# Altium PCB 起跑.PcbDoc
Units mm, origin at the board's own origin, x right, y up, seen from the top; angles counter-clockwise.
Board outline 161 x 31 mm, 2 copper layers (Top Layer, Bottom Layer); 33 components, 13 nets, 92 pads, 27 vias.
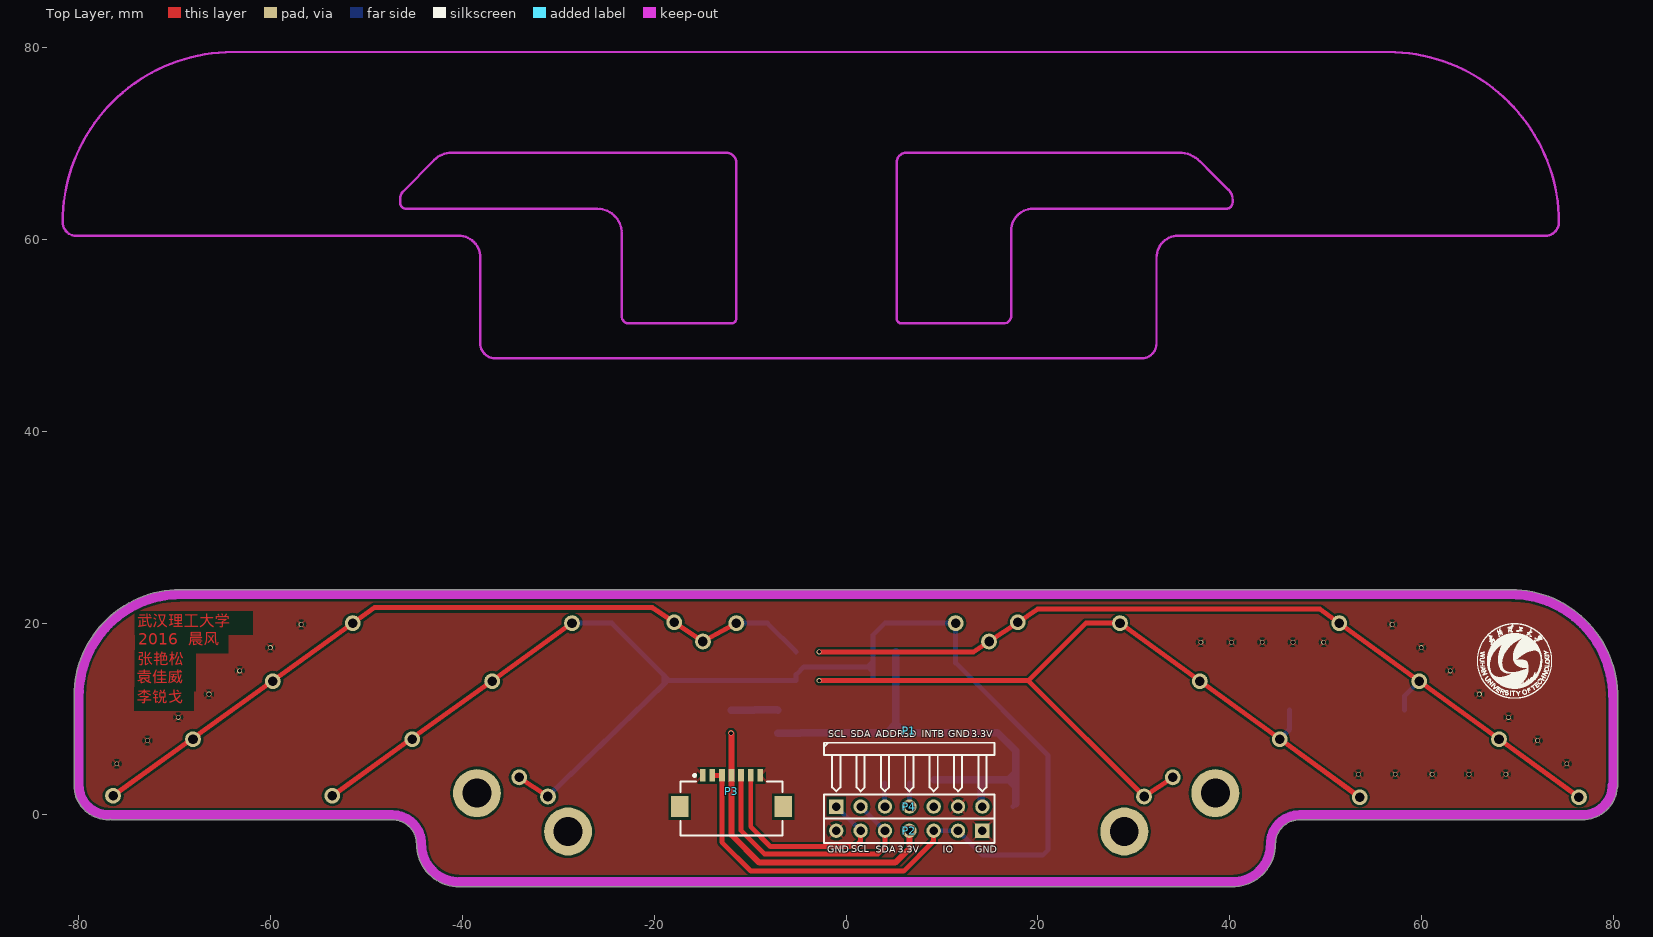
[diagram p0: Top Layer view]
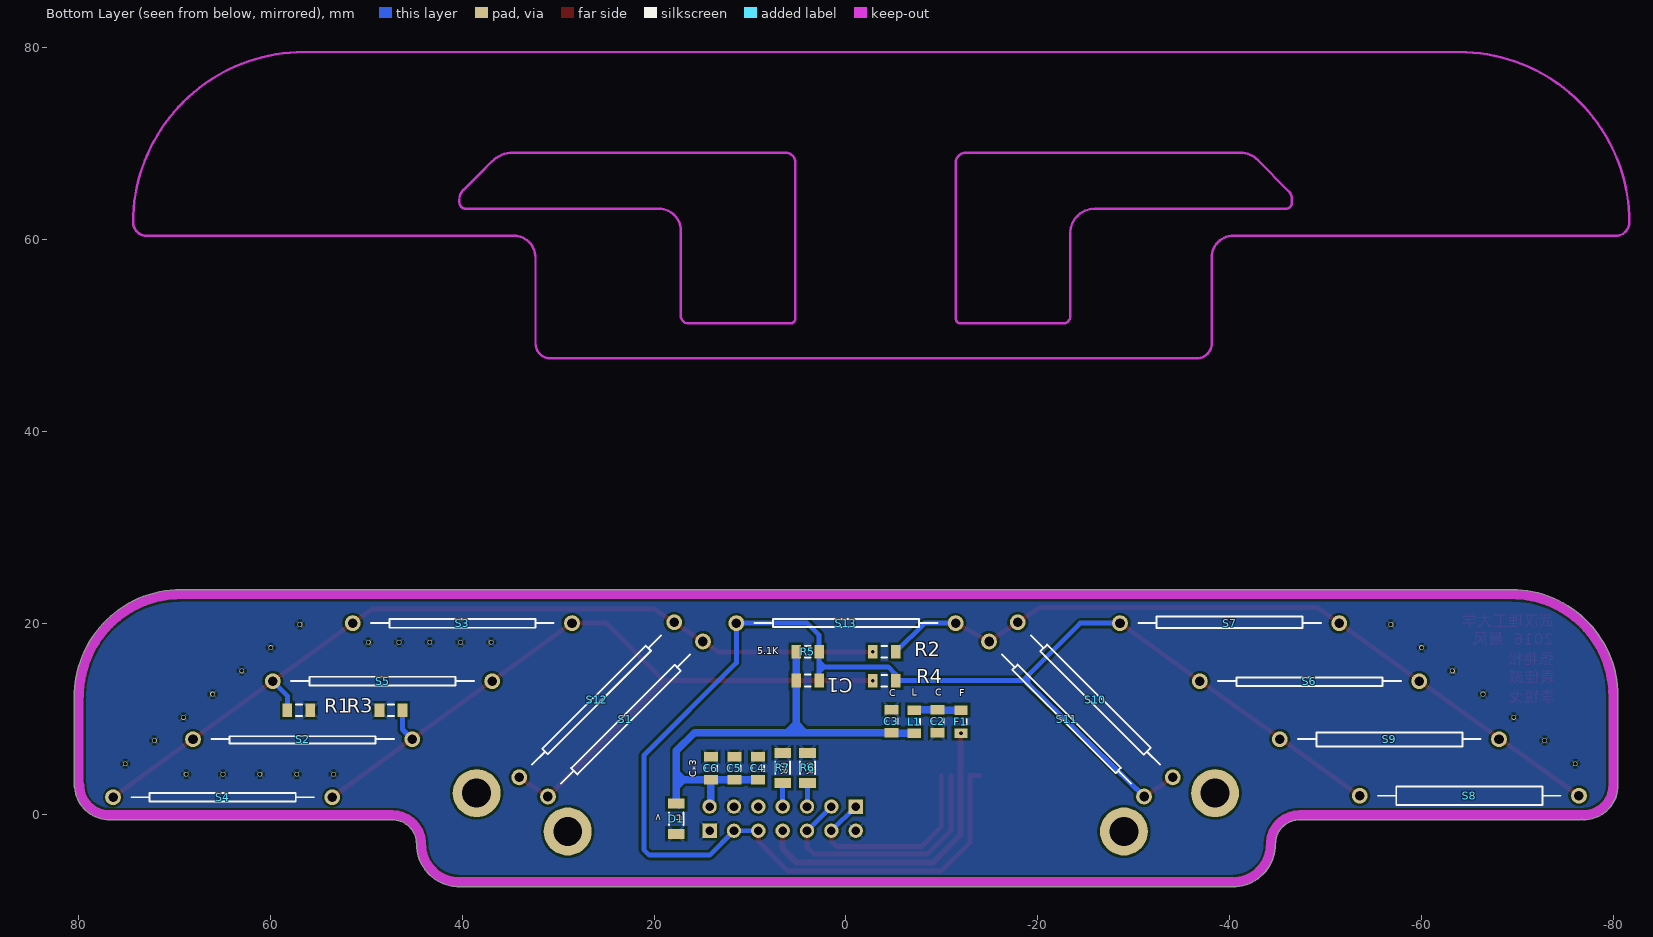
[diagram p1: Bottom Layer view, seen from below]

## Layer stack, top to bottom
Top Layer: signal copper 0.0356
Dielectric: dielectric 0.32, FR-4, Dk 4.8
Bottom Layer: signal copper 0.0356

## Board outline
-76.721,-0.463 ccw(c-76.53,0) -76.53,-0.5 -47.32,-0.5 cw(c-47.32,-3.038) -44.783,-3.038 ccw(c-44.283,-3.038) -44.783,-3.039 cw(c-40.32,-3.038) -44.783,-3.038 -44.783,-3.039 ccw(c-40.32,-3.038) -40.32,-7.5 40.488,-7.5 ccw(c40.488,-7) 40.571,-7.493 ccw(c40.32,-3.038) 44.783,-3.038 cw(c47.32,-3.038) 47.32,-0.5 76.962,-0.5 ccw(c76.962,0) 77.098,-0.481 ccw(c76.845,3.099) 80.424,2.834 ccw(c80,3.099) 80.5,3.099 80.5,12.522 ccw(c80,12.522) 80.453,12.735 ccw(c69.338,12.38) 69.338,23.5 -69.38,23.5 cw(c-69.38,23) -69.378,23.5 -69.38,23.5 ccw(c-69.38,12.38) -80.5,12.38 -80.5,3.089 cw(c-80,3.089) -80.5,3.09 -80.5,3.089 ccw(c-76.911,3.089) -76.911,-0.5 ccw(c-76.911,0)

## Design rules (kind name [scope] priority, off if disabled: settings)
Clearance [All] p1: gap=0.254
PolygonConnect [All] p1: connectstyle=Relief reliefconductorwidth=0.254 reliefentries=4 polygonreliefangle="45 Angle" airgapwidth=0.254
RoutingVias [All] p1: holewidth=0.711 width=1.27 viastyle="Through Hole" minholewidth=0.711 minwidth=1.27 maxholewidth=0.711 maxwidth=1.27
SilkToSolderMaskClearance SilkscreenOverComponentPads [IsPad] p1: minsilkscreentomaskgap=0.254 clearancetoexposedcopper=TRUE
SolderMaskExpansion [All] p1: expansion=0.102
Width [All] p1: maxlimit=1.27 minlimit=0.254 preferedwidth=0.762 minimp=50.000000 maximp=50.000000 favimp=50.000000
27 further rules are at their usual default settings.

## Components (designator, comment, footprint, x,y, rotation, side; value= is the part's Value field where it differs from the comment)
C1 "Cap" C2012 4,14 r180 bottom
C2 "Cap" c2012 -9.55,9.754 r90 bottom
C3 "Cap" C2012 -4.724,9.779 r270 bottom
C4 "Cap" C2012 9.195,4.859 r270 bottom
C5 "Cap" C2012 11.633,4.867 r270 bottom
C6 "Cap" C2012 14.097,4.867 r270 bottom
D1 "Diode 1N5401" 1206(2) 17.704,-0.406 r90 bottom
F1 "Fuse 1" r2012 -11.989,9.728 r90 bottom
L1 "Inductor" r2012 -7.112,9.728 r270 bottom
P1 "Header 7H" HDR1X7H -1.016,8.795 r0 top
P2 "Header 7" HDR1X7 14.224,-1.651 r180 top
P3 "Header 7" FFC/SM1.0-2H7 -11.938,2.489 r0 top
P4 "Header 7" HDR1X7 -1.016,0.871 r0 top
R1 "Res2" R2012 57.048,10.922 r180 bottom
R2 "Res2" R2012 -4,17 r0 bottom
R3 "Res2" R2012 47.447,10.922 r0 bottom
R4 "Res2" R2012 -4,14 r0 bottom
R5 "Res2" R2012 4,17 r180 bottom
R6 "0R" 1206(2) 4.013,4.902 r90 bottom
R7 "0R" 1206(2) 6.604,4.902 r90 bottom
S1 "SW-PB" AXIAL-0.9 23,10 r135 bottom
S2 "SW-PB" AXIAL-0.9 56.667,7.895 r0 bottom
S3 "SW-PB" AXIAL-0.9 40,20 r0 bottom
S4 "SW-PB" AXIAL-0.9 65,1.843 r0 bottom
S5 "SW-PB" AXIAL-0.9 48.333,13.948 r0 bottom
S6 "SW-PB" AXIAL-0.9 -48.333,13.948 r180 bottom
S7 "SW-PB" AXIAL-0.9 -40,20 r180 bottom
S8 "SW-PB" AXIAL-0.9 -65,2 r180 bottom
S9 "SW-PB" AXIAL-0.9 -56.667,7.895 r180 bottom
S10 "SW-PB" AXIAL-0.9 -26,12 r45 bottom
S11 "SW-PB" AXIAL-0.9 -23,10 r45 bottom
S12 "SW-PB" AXIAL-0.9 26,12 r135 bottom
S13 "SW-PB" AXIAL-0.9 0,20 r180 bottom

## Footprints (in the part's own frame and the unit in brackets; to place one, negate y for a bottom-side part, rotate by r counter-clockwise, add the part's x,y. Pads: shape width x height; smd on the part's side, far side on the other; paste and mask are expansions set on the pad)
1206(2) [mm]
  rect 1.05x1.75 smd: 1(-1.575,0) 2(1.575,0)
  silkscreen extent -0.65,-0.77 0.65,0.77, body extent -1.6,-0.8 1.6,0.8, height 1.6
AXIAL-0.9 [mm] "Axial Device, Thru-Hole; 2 Leads; 0.9 in Pin Spacing"
  round 1.65 hole 1: 1(-11.43,0) 2(11.43,0)
  silkscreen extent -9.53,-0.53 9.53,0.38
C2012 [mm] "Chip Capacitor, 2-Leads, Body 2.0x1.2mm, IPC Low Density"
  rect 1x1.45 smd: 1(-1.2,0) 2(1.2,0)
  silkscreen extent -0.3,-0.63 0.3,0.63, body extent -0.98,-0.6 1.02,0.6, height 0.5
c2012 [mm] "Chip Capacitor, 2-Leads, Body 2.0x1.2mm, IPC Low Density"
  rect 1x1.45 smd: 1(-1.2,0) 2(1.2,0)
  silkscreen extent -0.3,-0.63 0.3,0.63, body extent -0.98,-0.6 1.02,0.6, height 0.5
FFC/SM1.0-2H7 [mm] "Connector; FH12 Series; 7 Position; 1.0mm Spaced Bottom Standard Contact"
  rect 0.6x1.3 smd: 1(-3,1.625) 2(-2,1.625) 3(-1,1.625) 4(0,1.625) 5(1,1.625) 6(2,1.625) 7(3,1.625)
  rect 1.8x2.2 smd: 8(5.4,-1.625) 9(-5.4,-1.625)
  silkscreen extent -5.3,-4.62 5.3,1.75, body extent -5.3,-4.62 5.3,0.97, height 2
HDR1X7 [mm] "Connector; Header; 7 Position"
  rect 1.5x1.5 hole 0.9: 1(0,0)
  round 1.5 hole 0.9: 2(2.54,0) 3(5.08,0) 4(7.62,0) 5(10.16,0) 6(12.7,0) 7(15.24,0)
  silkscreen extent -1.27,-1.27 16.51,1.27
HDR1X7H [mm] "Connector; Header; 7 Position; Right Angle"
  rect 1.5x1.5 on Mech15: 1(0,0)
  round 1.5 on Mech15: 2(2.54,0) 3(5.08,0) 4(7.62,0) 5(10.16,0) 6(12.7,0) 7(15.24,0)
  silkscreen extent -1.27,-6.35 16.51,-1.27
r2012 [mm] "Chip Resistor, 2-Leads, Body 2.0x1.2mm, IPC Low Density"
  rect 1x1.4 smd: 1(-1.2,0) 2(1.2,0)
  silkscreen extent -0.3,-0.6 0.3,0.6, body extent -0.98,-0.6 1.02,0.6, height 0.5
R2012 [mm] "Chip Resistor, 2-Leads, Body 2.0x1.2mm, IPC Low Density"
  rect 1x1.4 smd: 1(-1.2,0) 2(1.2,0)
  silkscreen extent -0.3,-0.6 0.3,0.6, body extent -0.98,-0.6 1.02,0.6, height 0.5

## Part data
C1 C2 C3 C4 C5 C6: "Capacitor"
D1: "3 Amp General Purpose Rectifier"
F1: "Fuse"
P1: "Header, 7-Pin, Right Angle"
P2 P3 P4: "Header, 7-Pin"
R1 R2 R3 R4 R5: "Resistor"
R6 R7: library part Res, "Resistor"
S1 S2 S3 S4 S5 S6 S7 S8 S9 S10 S11 S12 S13: "Switch"

## Free pads (board coordinates)
  round 5 hole 3: 0(38.519,2.273) 1(-38.481,2.273) 2(29.019,-1.727) 3(-28.981,-1.727)

## Via types
v1: diameter 0.508, hole 0.381, Top Layer to Bottom Layer, 27 vias

## Nets (pads, with @x,y where several pads share a name; then routed paths per layer and width w, separated by ;. In a path a pad name is that pad's centre, name@x,y a point inside that pad or via, vN(x,y) a via of type N, cw(c..) or ccw(c..) an arc to the next point about the centre after c; other vN are vias at no path point)
3.3V: C1.1 C3.2 C4.2 C5.2 C6.2 D1.2 L1.2 P4.7 R5.1 | length 56.8
  Bottom Layer w0.508: C6.2@14.089,3.659 C6.2 C6.2@14.224,3.54 ; P4.7@14.097,0.998 P4.7 ; D1.2@17.406,0.871 D1.2
  Bottom Layer w0.762: L1.2 -4.775,8.528 C3.2 4.279,8.579 ; R5.1 C1.1 5.2,9.5 ; 6.248,8.579 6.121,8.579 ; C4.2 9.203,3.667 C5.2 C6.2 ; P4.7@14.097,0.998 C6.2 ; P4.7 P4.7@14.522,1.169 ; D1.2 17.704,2.931 ; 4.279,8.579 5.105,8.579 ; 4.279,8.579 5.2,9.5 ; 5.105,8.579 6.121,8.579 ; 5.105,8.579 5.2,8.674 5.2,9.5 ; 5.2,9.5 6.121,8.579 ; 6.121,8.579 15.805,8.579 17.704,6.68 17.704,4.404 ; C6.2 16.967,3.667 ; 16.967,3.667 17.704,2.931 ; 16.967,3.667 17.694,3.667 17.704,3.658 ; 16.967,3.667 17.704,4.404 ; 17.704,2.931 17.704,3.658 ; 17.704,3.658 17.704,4.404
ADDR: P4.3 R6.1 | length 2.5
  Bottom Layer w0.508: R6.1 4.013,0.921 P4.3
GND: C2.1 C3.1 C4.1 C5.1 C6.1 D1.1 P2.1 P2.7 P3.1 P3.7 P4.6 R1.2 R3.2 R6.2 R7.2
  other v1: 53.44,4.242 57.282,4.242 61.123,4.242 64.965,4.242 68.807,4.242 -76.048,5.334 75.159,5.334 -72.843,7.755 72.123,7.755 -69.638,10.177 69.088,10.177 -66.434,12.598 66.053,12.598 -63.229,15.02 63.017,15.02 -60.024,17.441 59.982,17.441 37,18 40.202,18 43.405,18 46.607,18 49.809,18 -56.82,19.863 56.947,19.863
INTB: P4.5
IO1: C1.2 P2.2 P2.3 P3.2 P3.3 R4.1 R5.2 S6.1 S7.1 S8.1 S9.1 S10.1 S11.1 S13.1 | length 177.5
  Top Layer w0.508: S8.1 -45.286,7.964 -36.928,13.982 S7.1 ; S10.1 S11.1 ; P3.2 P3.3 -12.938,-2.835 -9.906,-5.867 6.02,-5.867 9.119,-2.769 9.119,-1.676 P2.3
  Bottom Layer w0.508: S11.1 -18.98,13.648 ; S7.1 -24.42,20 -18.992,14.573 ; C1.2 2.8,14.929 ; P2.3 P2.2 14.224,-4.191 20.523,-4.191 21.082,-3.632 21.082,6.198 11.43,15.85 S13.1 4.049,20 2.8,18.751 R5.2 2.8,15.957 ; -18.992,14.573 -18.517,14.097 ; -18.992,14.573 -18.992,13.66 -18.98,13.648 ; -18.98,13.648 -18.517,14.097 ; -18.517,14.097 -18.42,14 R4.1 -5.2,14.637 -4.394,15.443 2.286,15.443 ; 2.286,15.443 2.8,14.929 ; 2.286,15.443 2.8,15.443 ; 2.286,15.443 2.8,15.957 ; 2.8,14.929 2.8,15.443 ; 2.8,15.443 2.8,15.957
NetC2_2: C2.2 F1.2 L1.1 | length 4.9
  Bottom Layer w0.762: F1.2 -9.576,10.928 C2.2 -7.137,10.954 L1.1
NetR1_1: R1.1 R2.2 S1.2 S2.2 S3.2 S4.2 S5.2 S12.2 | length 90.6
  Top Layer w0.508: v1(-2.8,17) 13.325,17 ; 13.325,17.02 S1.2 S12.2 19.937,21.428 ; 19.937,21.46 49.43,21.46 49.458,21.432 S3.2 S5.2 S2.2 S4.2
  Bottom Layer w0.508: R1.1 58.248,12.433 S5.2
NetR2_1: R2.1 S6.2 S7.2 S8.2 S9.2 S10.2 S11.2 S13.2 | length 80.4
  Top Layer w0.508: S8.2 -68.146,7.964 -59.788,13.982 -49.178,21.621 ; -49.174,21.615 -20.189,21.615 ; -20.189,21.596 S11.2 S13.2
  Bottom Layer w0.508: S13.2 -8.2,20 R2.1
NetR3_1: R3.1 R4.2 S1.1 S2.1 S3.1 S4.1 S5.1 S12.1 | length 88.9
  Top Layer w0.508: v1(-2.8,14) 19,14 ; S12.1 S1.1 19,14 ; S4.1 S2.1 S5.1 S3.1 25,20 19,14
  Bottom Layer w0.508: S2.1 46.247,8.906 R3.1
SCL: P2.6 P3.6 P4.1 | length 22.6
  Top Layer w0.508: P3.6 -9.938,-1.238 -7.874,-3.302 0.94,-3.302 1.524,-2.718 P2.6
  Bottom Layer w0.508: P4.1@-0.998,0.871 P2.6
  Bottom Layer w0.762: P4.1 P4.1@-0.998,0.871
SD: P4.4 R7.1 | length 2.5
  Bottom Layer w0.508: P4.4 6.629,0.896 R7.1@6.629,3.327
SDA: P2.5 P3.5 P4.2 | length 27.3
  Top Layer w0.508: P3.5 -10.938,-1.652 -8.526,-4.064 3.353,-4.064 4.064,-3.353 P2.5
  Bottom Layer w0.508: P4.2 P2.5@4.046,-1.651
  Bottom Layer w0.762: P2.5@4.046,-1.651 P2.5
VCC: F1.1 P2.4 P3.4 | length 32.8
  Top Layer w0.635: v1(-11.989,8.528) -11.938,8.477 P3.4 -11.938,-2.066 -9.026,-4.978 5.131,-4.978 6.604,-3.505 P2.4
pads on no net: P1.1 P1.2 P1.3 P1.4 P1.5 P1.6 P1.7 P3.8 P3.9

## Polygon pours and split planes (outlines as drawn)
GND on Top Layer "Keep-Out Layer-No Net" (solid, remove dead copper, pour order 2): -80.774,25.162 -80.774,-9.382 84.91,-9.382 85.114,-9.382 85.114,26.051
GND on Bottom Layer "Keep-Out Layer-No Net" (solid, remove dead copper, pour order 4): -89.129,27 -89.129,-10.795 -16.205,-10.795 87.097,-10.795 87.097,28.194

## Keep-outs
Keep-Out Layer:
  lines w0.254: 5.272,52.578 5.272,51.765 ; 5.272,68.031 5.272,51.765 ; 5.283,68.051 cw(c6.288,68.051) 6.288,69.056 34.736,69.056 cw(c34.736,65.99) 36.904,68.158 38.272,66.79 39.891,65.171 cw(c38.868,64.148) 40.315,64.148 40.315,63.865 cw(c39.661,63.865) 39.661,63.212 19.52,63.212 ccw(c19.52,60.914) 17.222,60.914 17.222,52.035 cw(c16.448,52.035) 16.448,51.261 5.776,51.261 ; 5.78,51.257 cw(c5.78,51.765) 5.272,51.765 ; 74.343,61.708 cw(c72.949,61.799) 72.949,60.402 34.664,60.402 ccw(c34.664,58.117) 32.378,58.117 32.378,49.149 cw(c30.854,49.149) 30.854,47.624 -36.606,47.624 cw(c-36.606,49.149) -38.131,49.149 -38.131,58.117 ccw(c-40.416,58.117) -40.416,60.402 -80.289,60.402 cw(c-80.289,61.799) -81.687,61.799 cw(c-63.933,61.799) -63.933,79.553 56.529,79.553 cw(c56.529,61.736) 74.346,61.805 ; 74.343,61.708 ccw(c74.219,61.736) 74.346,61.736 ccw(c56.529,61.736) 74.346,61.786 ; 74.343,61.708 74.343,61.708 ; 74.346,61.786 ccw(c72.949,61.799) 74.346,61.799 ccw(c74.219,61.799) 74.346,61.805 ; 74.346,61.786 74.346,61.786 ; 74.346,61.805 74.346,61.805 ; -46.501,63.858 ccw(c-45.845,63.858) -45.845,63.202 -25.915,63.202 cw(c-25.915,60.68) -23.393,60.68 -23.393,53.645 -23.393,52.013 ccw(c-22.631,52.013) -22.631,51.251 -11.96,51.251 ccw(c-11.96,51.765) -11.445,51.765 -11.445,68.02 ccw(c-12.471,68.02) -12.471,69.046 -41.146,69.046 ccw(c-41.146,66.506) -42.942,68.302 -46.205,64.984 ccw(c-45.49,64.269) -46.501,64.269 -46.501,63.858
  lines w1: 40.32,-7 ccw(c40.32,-3.038) 44.283,-3.038 cw(c47.32,-3.038) 47.32,0 76.962,0 ; 40.488,-7 -40.32,-7 cw(c-40.32,-3.038) -44.283,-3.038 ccw(c-47.32,-3.038) -47.32,0 -53.777,0 -76.53,0 -76.911,0 cw(c-76.911,3.089) -80,3.089 -80,12.38 cw(c-69.38,12.38) -69.38,23 59.03,23 ; 58.852,23 69.338,23 cw(c69.338,12.38) 79.958,12.38 ; 76.845,0.01 ccw(c76.845,3.099) 79.934,3.099 ; 80,3.099 80,12.522

## Other copper
Top Layer:
  text "武汉理工大学" at -73.894,19.272 h2
  text "晨风" at -68.58,17.374 h2
  text "2016" at -73.812,17.323 h2
  text "张艳松" at -73.838,15.316 h2
  text "袁佳威" at -73.939,13.411 h2
  text "李锐戈" at -73.965,11.354 h2

## Silkscreen, mask and mechanical layers (free items; w line width, h text height)
Top Overlay:
  drawing of 2348 lines, arcs and shapes, not listed
  text "SCL" at -1.829,7.833 h1.27
  text "SDA" at 0.508,7.833 h1.27
  text "ADDR" at 3.124,7.823 h1.27
  text "SD" at 5.994,7.833 h1.27
  text "INTB" at 7.899,7.823 h1.27
  text "GND" at 10.643,7.833 h1.27
  text "3.3V" at 13.056,7.833 h1.27
  text "SCL" at 0.559,-4.166 h1.27
  text "SDA" at 3.099,-4.191 h1.27
  text "IO" at 10.109,-4.191 h1.27
  text "GND" at 13.489,-4.189 h1.27
  text "GND" at -1.956,-4.216 h1.27
  text "3.3V" at 5.41,-4.216 h1.27
Bottom Overlay:
  text "5.1K" at 9.271,16.485 h1.27
  text "L" at -6.858,12.167 h1.27
  text "C" at -9.296,12.141 h1.27
  text "C" at -4.521,12.116 h1.27
  text "F" at -11.786,12.09 h1.27
  text "0R" at 4.369,5.512 h1.27 r90
  text "0R" at 7.087,5.512 h1.27 r90
  text "C*3" at 16.586,3.912 h1.27 r90
  text "D" at 18.11,-0.66 h1.27 r90
  text ">" at 20.168,-0.686 h1.27 r90
Mechanical 15:
  lines w0.254: -38.481,2.273 29.019,-1.727 ; -28.981,-1.727 38.519,2.273 ; 0,-0.01 0,35.712 ; -23.976,7.525 24.024,40.025 ; -23.976,7.525 -23.976,40.025 ; -23.976,7.525 24.024,7.525 ; -23.976,40.025 24.024,7.525 ; -23.976,40.025 24.024,40.025 ; 24.024,7.525 24.024,40.025